# Altium PCB esp32control.PcbDoc
Units mil, origin at the board's own origin, x right, y up, seen from the top; angles counter-clockwise.
Board outline 1740 x 3934 mil, 2 copper layers (Top Layer, Bottom Layer); 18 components, 19 nets, 193 pads, 23 vias.
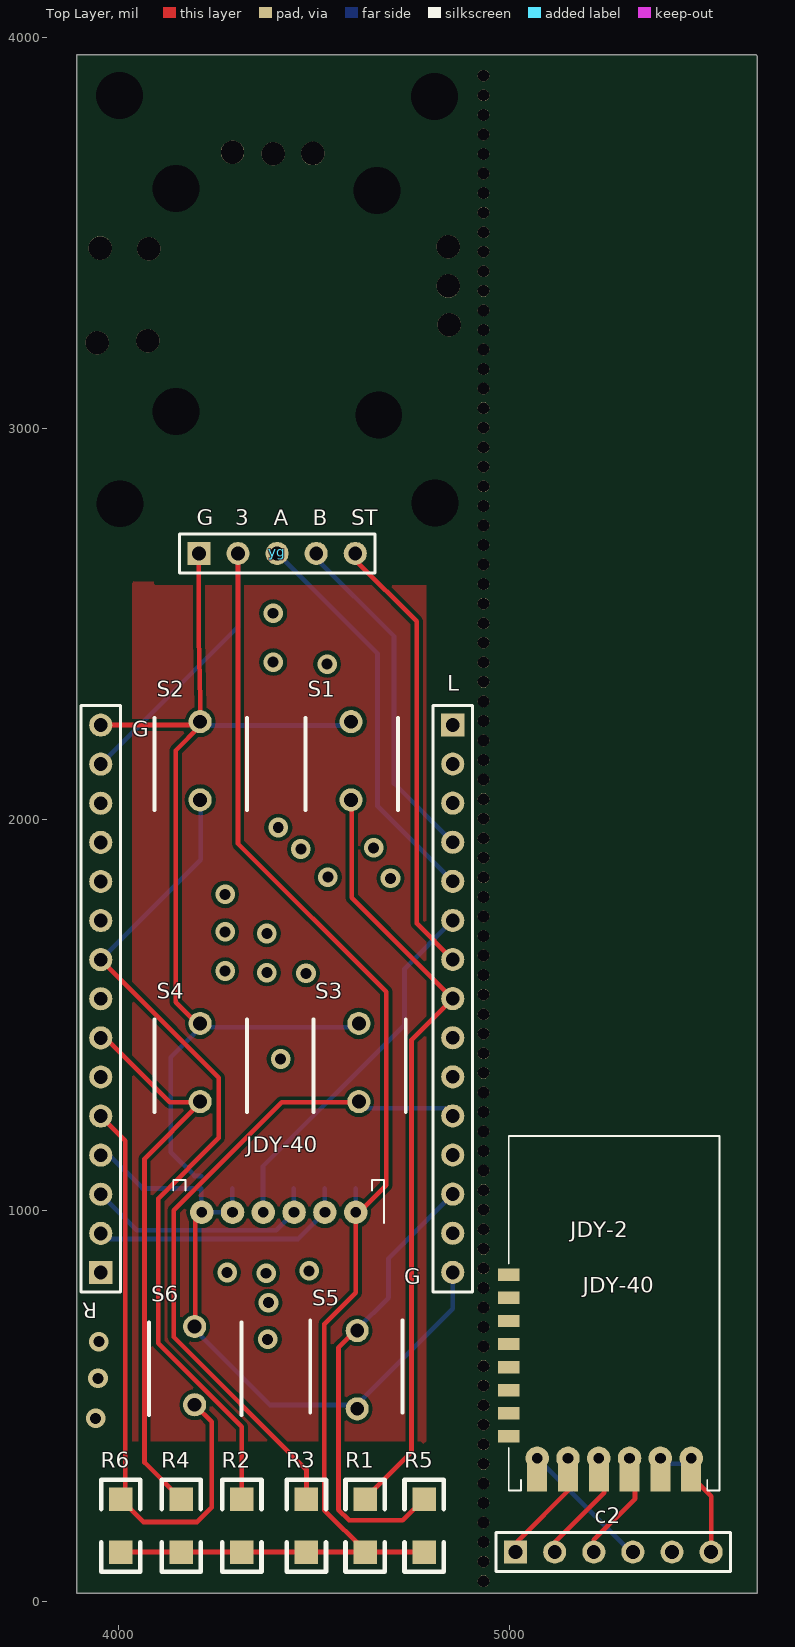
[diagram p0: Top Layer view]
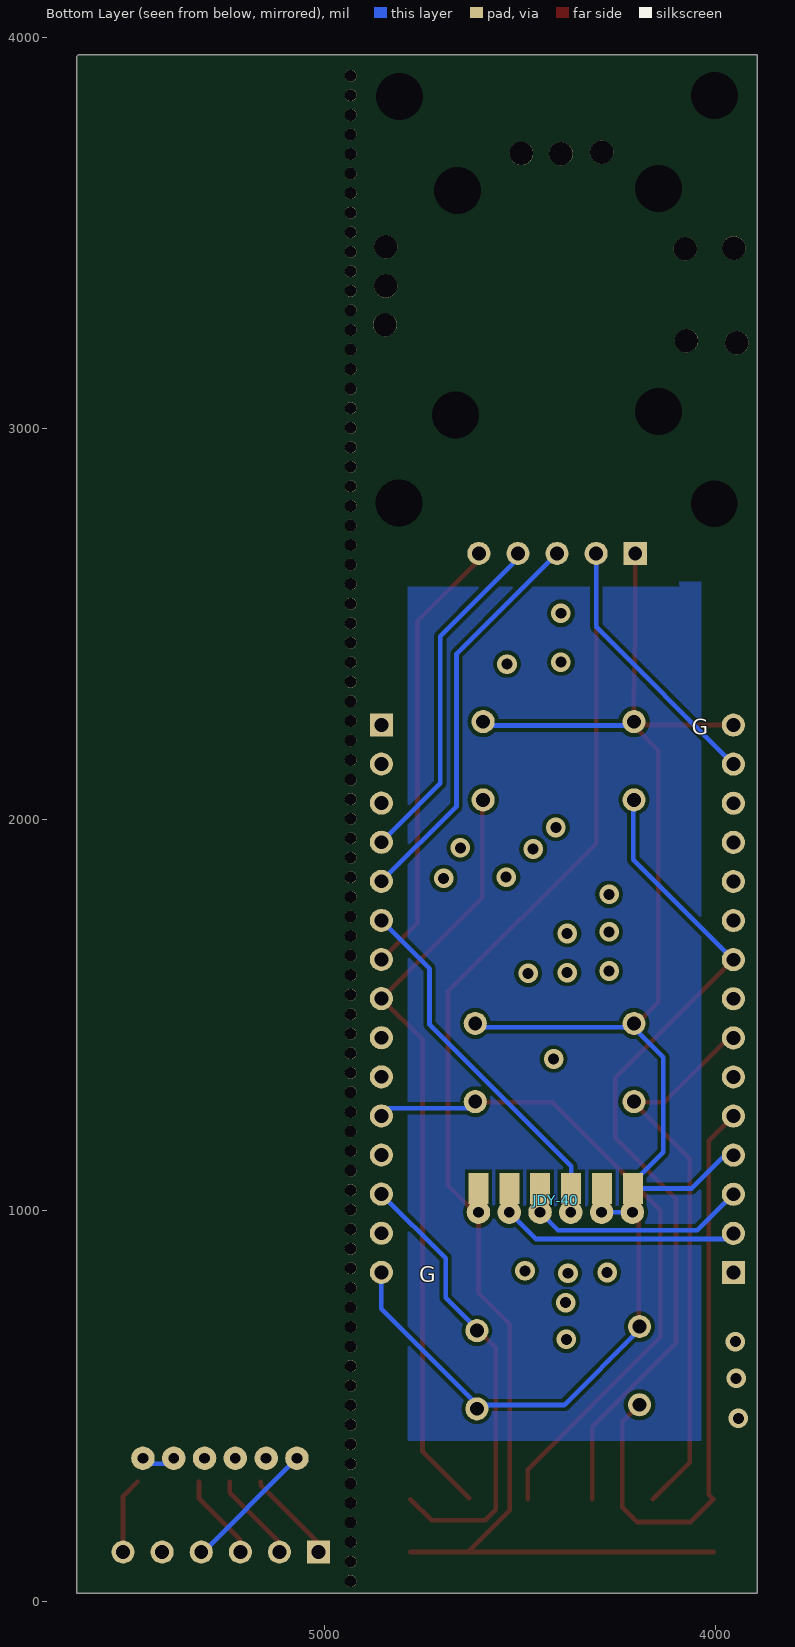
[diagram p1: Bottom Layer view, seen from below]

## Layer stack, top to bottom
Top Solder: solder mask 0.4, Solder Resist, Dk 3.5
Top Layer: signal copper 1.4
Dielectric 1: dielectric 12.6, FR-4, Dk 4.8
Bottom Layer: signal copper 1.4
Bottom Solder: solder mask 0.4, Solder Resist, Dk 3.5

## Board outline
3894,21 5634,21 5634,3952 5631,3955 3894,3955

## Design rules (kind name [scope] priority, off if disabled: settings)
Clearance [All] p1: gap=10 ignorepadtopadclearanceinfootprint=FALSE except(0: Arc-Hole Track-Hole SMDPad-Hole THPad-Hole Via-Hole Fill-Hole Poly-Hole Region-Hole Text-Hole)
HoleSize [All] p1: absolutevalues=TRUE maxlimit=10000 minlimit=1 maxpercent=80.000 minpercent=20.000
PolygonConnect [All] p1: connectstyle=Relief reliefconductorwidth=10 reliefentries=4 polygonreliefangle="90 Angle" airgapwidth=10
RoutingVias [All] p1: holewidth=28 width=50 viastyle="Through Hole" minholewidth=28 minwidth=50 maxholewidth=10000 maxwidth=99999
SolderMaskExpansion [All] p1: expansion=4
Width [All] p1: maxlimit=32 minlimit=8 preferedwidth=12
29 further rules are at their usual default settings.

## Components (designator, comment, footprint, x,y, rotation, side; value= is the part's Value field where it differs from the comment)
c2 "Header 6" HDR1X6 5016,126 r0 top
JDY-2 "Header 6" JDY-401#1 4998.46,835.21 r0 top
JDY-40 "Header 6" JDY-401#2 4679.83,525.58 r180 top
L "Header 15" HDR1X15 4855.28,2241.41 r270 top
R "Header 15" HDR1X15 3955,841 r90 top
R1 "Res1" 1206 4631,261 r270 top value=1K
R2 "Res1" 1206 4316,261 r270 top value=1K
R3 "Res1" 1206 4481,261 r270 top value=1K
R4 "Res1" 1206 4161,261 r270 top value=1K
R5 "Res1" 1206 4782,261 r270 top value=1K
R6 "Res1" 1206 4006,261 r270 top value=1K
S1 "SW-PB" PCBCOMPONENT_1 5195.11,2359.68 r180 top
S2 "SW-PB" PCBCOMPONENT_1 4809.11,2359.69 r180 top
S3 "SW-PB" PCBCOMPONENT_1 5215.11,1587.89 r180 top
S4 "SW-PB" PCBCOMPONENT_1 4809.11,1587.89 r180 top
S5 "SW-PB" PCBCOMPONENT_1 4010.89,382.31 r0 top
S6 "SW-PB" PCBCOMPONENT_1 4795.11,812.68 r180 top
yg "Header 5" HDR1X5 4206,2680 r0 top

## Footprints (in the part's own frame and the unit in brackets; to place one, negate y for a bottom-side part, rotate by r counter-clockwise, add the part's x,y. Pads: shape width x height; smd on the part's side, far side on the other; paste and mask are expansions set on the pad)
1206 [mil]
  rect 60x60 smd: 1(0,0) 2(135,0)
  silkscreen extent -50,-50 185,50
HDR1X5 [mm] "Connector; Header; 5 Position"
  rect 1.5x1.5 hole 0.9: 1(0,0)
  round 1.5 hole 0.9: 2(2.54,0) 3(5.08,0) 4(7.62,0) 5(10.16,0)
  silkscreen extent -1.27,-1.27 11.43,1.27
HDR1X6 [mm] "Connector; Header; 6 Position"
  rect 1.5x1.5 hole 0.9: 1(0,0)
  round 1.5 hole 0.9: 2(2.54,0) 3(5.08,0) 4(7.62,0) 5(10.16,0) 6(12.7,0)
  silkscreen extent -1.27,-1.27 13.97,1.27
HDR1X15 [mm] "Connector; Header; 15 Position"
  rect 1.5x1.5 hole 0.9: 1(0,0)
  round 1.5 hole 0.9: 2(2.54,0) 3(5.08,0) 4(7.62,0) 5(10.16,0) 6(12.7,0) 7(15.24,0) 8(17.78,0) 9(20.32,0) 10(22.86,0) 11(25.4,0) 12(27.94,0) 13(30.48,0) 14(33.02,0) 15(35.56,0)
  silkscreen extent -1.27,-1.27 36.83,1.27
JDY-401#1 [mm]
  rect 1.3x2 smd: 1(11.85,-13.092) 2(9.85,-13.092) 3(7.85,-13.092) 4(5.85,-13.092) 5(3.85,-13.092) 6(1.85,-13.092)
  round 1.524 hole 0.7: 1(11.85,-11.918) 2(9.85,-11.918) 3(7.85,-11.918) 4(5.85,-11.918) 5(3.85,-11.918) 6(1.85,-11.918)
  rect 1.4x0.8 smd: ""(0,-10.5) ""(0,-9) ""(0,-7.5) ""(0,-6) ""(0,-4.5) ""(0,-3) ""(0,-1.5) ""(0,0)
  silkscreen extent 0,-14.02 13.7,9.01
JDY-401#2 [mm]
  round 1.524 hole 0.7: 1(11.85,-11.918) 2(9.85,-11.918) 3(7.85,-11.918) 4(5.85,-11.918) 5(3.85,-11.918) 6(1.85,-11.918)
  rect 1.3x2 smd far side: 1(11.883,-13.473) 2(9.876,-13.473) 3(7.87,-13.473) 4(5.863,-13.473) 5(3.857,-13.473) 6(1.85,-13.473)
  Top Layer lines w0.5: 1.85,-11.694 1.85,-11.918
  silkscreen extent 0,-14.02 13.7,-11.23
PCBCOMPONENT_1 [mm]
  round 1.5 hole 0.9: 1(15.24,7.874) 2(15.24,2.794)
  silkscreen extent 12.19,2.54 18.19,8.54

## Part data
c2 JDY-2 JDY-40: "Header, 6-Pin", LatestRevisionDate=17-Jul-2002, LatestRevisionNote="Re-released for DXP Platform.", Publisher="Altium Limited"
L R: "Header, 15-Pin", LatestRevisionDate=17-Jul-2002, LatestRevisionNote="Re-released for DXP Platform.", Publisher="Altium Limited"
R1 R2 R3 R4 R5 R6: "Resistor", LatestRevisionDate=17-Jul-2002, LatestRevisionNote="Re-released for DXP Platform.", PackageDescription="Axial Device, Thru-Hole; 2 Leads; 0.3 in Pin Spacing", PackageReference=AXIAL-0.3, Published=8-Jun-2000, Publisher="Altium Limited"
S1 S2 S3 S4 S5 S6: "Switch", LatestRevisionDate=17-Jul-2002, LatestRevisionNote="Re-released for DXP Platform.", PackageDescription="Switch; 2 Leads", PackageReference=SPST-2, Published=24-Mar-1999, Publisher="Altium Limited"
yg: "Header, 5-Pin", LatestRevisionDate=17-Jul-2002, LatestRevisionNote="Re-released for DXP Platform.", Publisher="Altium Limited"

## Free pads (board coordinates)
  round 60 hole 60: 6(3946,3219) 6(3954,3461) 6(4075,3224) 6(4078,3459) 6(4292,3706) 6(4396,3702) 6(4497,3703) 6(4844,3364) 6(4844,3464) 6(4846,3265)
  round 60 hole 120: 6(4003,3851) 6(4004,2807) 6(4147,3043) 6(4147,3613) 6(4661,3608) 6(4666,3034) 6(4809,3849) 6(4810,2809)
  round 30 hole 30: 6(4934,51.53) 107(4934,101.53) 108(4934,151.53) 109(4934,201.53) 110(4934,251.53) 111(4934,301.53) 112(4934,351.53) 113(4934,401.53) 114(4934,451.53) 115(4934,501.53) 116(4934,551.53) 117(4934,601.53) 118(4934,651.53) 119(4934,701.53) 120(4934,751.53) 121(4934,801.53) 122(4934,851.53) 123(4934,901.53) 124(4934,951.53) 125(4934,1001.53) 126(4934,1051.53) 127(4934,1101.53) 128(4934,1151.53) 129(4934,1201.53) 130(4934,1251.53) 131(4934,1301.53) 132(4934,1351.53) 133(4934,1401.53) 134(4934,1451.53) 135(4934,1501.53) 136(4934,1551.53) 137(4934,1601.53) 138(4934,1651.53) 139(4934,1701.53) 140(4934,1751.53) 141(4934,1801.53) 142(4934,1851.53) 143(4934,1901.53) 144(4934,1951.53) 145(4934,2001.53) 146(4934,2051.53) 147(4934,2101.53) 148(4934,2151.53) 149(4934,2201.53) 150(4934,2251.53) 151(4934,2301.53) 152(4934,2351.53) 153(4934,2401.53) 154(4934,2451.53) 155(4934,2501.53) 156(4934,2551.53) 157(4934,2601.53) 158(4934,2651.53) 159(4934,2701.53) 160(4934,2751.53) 161(4934,2801.53) 162(4934,2851.53) 163(4934,2901.53) 164(4934,2951.53) 165(4934,3001.53) 166(4934,3051.53) 167(4934,3101.53) 168(4934,3151.53) 169(4934,3201.53) 170(4934,3251.53) 171(4934,3301.53) 172(4934,3351.53) 173(4934,3401.53) 174(4934,3451.53) 175(4934,3501.53) 176(4934,3551.53) 177(4934,3601.53) 178(4934,3651.53) 179(4934,3701.53) 180(4934,3751.53) 181(4934,3801.53) 182(4934,3851.53) 183(4934,3901.53)

## Via types
v1: diameter 50, hole 28, Top Layer to Bottom Layer, 23 vias

## Nets (pads, with @x,y where several pads share a name; then routed paths per layer and width w, separated by ;. In a path a pad name is that pad's centre, name@x,y a point inside that pad or via, vN(x,y) a via of type N, cw(c..) or ccw(c..) an arc to the next point about the centre after c; other vN are vias at no path point)
3v: JDY-40.6 R1.2 R2.2 R3.2 R4.2 R5.2 R6.2 R.14 yg.2 | length 4337.1
  Top Layer w12: R6.2 R4.2 R2.2 R3.2 R1.2 R5.2@4781,126 ; yg.2 4306,1938 4685,1559 4685,1063.96 4607,985.96 4607,789 4527,709 4527,233 R1.2@4631,129
  Bottom Layer w12: R.14 4306,2492 yg.2 ; JDY-40.6@4607,994.8 JDY-40.6@4607,1056
a: L.5 yg.3 | length 1024.7
  Bottom Layer w12: yg.3 4663,2423 4663,2033.68 L.5
b: L.4 yg.4 | length 871.7
  Bottom Layer w12: yg.4@4505,2668 4705,2468 4705,2091.68 L.4
GND: JDY-40.1 JDY-40.2 L.15 R.4 R.15 S1.2 S2.2 S3.2 S4.2 S5.2 S6.2 yg.1 | length 4503.1
  Top Layer w12: R.15 4210,2241 S2.2@4211,2240 ; S6.2@4197,693 4197,978.5 JDY-40.1@4213.3,994.8 ; yg.1 4206,2465 4210.78,2249.72 S2.2@4211,2240 ; S4.2@4211,1468.2 4147,1532.2 4147,2176 S2.2@4211,2240
  Bottom Layer w12: R.4 3977,1141 4062,1056 4212,1056 4212,1025.3 4213.3,1024 4213.3,994.8 4292.04,994.8 4292.04,1024 4291,1025.04 JDY-40.2@4291,1056 ; S6.2@4197,693 4388,502 4609,502 4855.28,748.28 L.15 ; S2.2@4211,2240 S1.2@4597,2240 ; JDY-40.1@4212,1088 4195,1088 4134,1149 4134,1391.2 4211,1468.2 S3.2@4617,1468.2
rg: c2.6 JDY-2.1 JDY-2.2 | length 273.9
  Top Layer w12: JDY-2.1@5479,305.8 5516,268.8 c2.6
  Bottom Layer w12: JDY-2.2@5400.26,352 JDY-2.1@5479,352
rs: c2.3 JDY-2.3 | length 223.5
  Top Layer w12: c2.3 5216,157 5321.52,262.52 JDY-2.3@5321.52,305.8
rvc: c2.4 JDY-2.6 | length 324.3
  Bottom Layer w12: JDY-2.6@5085.3,352 5311.3,126 c2.4
rx: JDY-40.4 R.3 | length 613.2
  Bottom Layer w12: R.3 4047.2,948.8 4403.52,948.8 4449.52,994.8 4449.52,1025 4449,1025.52 JDY-40.4@4449,1056
rx1: c2.2 JDY-2.4 | length 232.3
  Top Layer w12: c2.2 5116,151 5242.78,277.78 JDY-2.4@5242.78,305.8
s: JDY-40.3 L.6 | length 947.9
  Bottom Layer w12: JDY-40.3@4370.78,994.8 4370.78,1025 4370,1025.78 4370,1056 4370,1113 4732,1475 4732,1618.13 L.6
s1: L.8 R1.1 S1.1 | length 1983.7
  Top Layer w12: S1.1@4597,2047.8 4597,1799.68 L.8 4750,1436.13 4750,383 R1.1@4631,264
s2: R2.1 R.9 S2.1 | length 2170.8
  Top Layer w12: R.9 4257,1339 4257,1185 4102,1030 4102,660.18 4316,446.18 R2.1
  Bottom Layer w12: R.9 4211,1897 S2.1@4211,2047.8
s3: L.11 R3.1 S3.1 | length 1721.3
  Top Layer w12: R3.1 4481,337 4142,676 4142,1000 4418,1276 S3.1@4617,1276
  Bottom Layer w12: S3.1@4617,1276 4632,1261 4835.68,1261 L.11
s4: R4.1 R.7 S4.1 | length 1437.9
  Top Layer w12: R.7 3967,1441 4132,1276 4211,1276 4067,1132 4067,355 R4.1
s5: L.13 R5.1 S5.1 | length 1180
  Top Layer w12: S5.1@4609,694.2 4563,648.2 4563,234 4590,207 4727,207 R5.1@4781,261
  Bottom Layer w12: S5.1@4609,694.2 4691,776.2 4691,877.13 L.13
s6: R6.1 R.5 S6.1 | length 1561.6
  Top Layer w12: R.5 4018,1178 4018,273 R6.1 4064,203 4202,203 4239,240 4239,458.8 S6.1@4197,500.8
st: L.7 yg.5 | length 1141.8
  Top Layer w12: yg.5 4606,2663 4763,2506 4763,1733.68 L.7
tx: JDY-40.5 R.2 | length 668.6
  Bottom Layer w12: R.2 3969.2,926.8 4460.26,926.8 4528.26,994.8 4528.26,1025 4528,1025.26 JDY-40.5@4528,1056
tx1: c2.1 JDY-2.5 | length 241.1
  Top Layer w12: c2.1 5016,148.91 5164.04,296.95 JDY-2.5@5164.04,305.8
pads on no net: c2.5 JDY-2. L.1 L.2 L.3 L.9 L.10 L.12 L.14 R.1 R.6 R.8 R.10 R.11 R.12 R.13
copper on no net:
  other v1: 3942,468 3948,570 3950,664 4382,670 4384,764 4378,839 4278,841 4488,845 4415,1387 4480,1606 4380,1608 4273,1612 4380,1708 4273,1712 4273,1808 4696,1849 4536,1852 4467,1924 4653,1927 4409,1979 4534,2397 4396,2402 4396,2527

## Polygon pours and split planes (outlines as drawn)
no net on Top Layer "Top Layer-No Net" (solid, pour order 5): 4091,2602 4095,2598 4787,2598 4787,410 4780,403 4774,409 4035,409 4035,2604 4040,2609 4041,2608 4091,2608
GND on Top Layer "Mechanical 8-GND" (solid, pour order 1): 5586,368
no net on Bottom Layer "Bottom Layer-No Net" (solid, pour order 9): 4019,2519
no net on Bottom Layer "Bottom Layer-No Net 1" (solid, pour order 7): 4788,2595 4092,2595 4091,2596 4093,2598 4093,2608 4037,2608 4037,411 4791,411 4788,414

## Silkscreen, mask and mechanical layers (free items; w line width, h text height)
Top Overlay:
  text "G" at 4200,2752 h40
  text "3" at 4299,2752 h40
  text "A" at 4398,2752 h40
  text "B" at 4497,2752 h40
  text "ST" at 4596,2752 h40
  text "G" at 4035,2211 h40
  text "G" at 4731,811 h40
Bottom Overlay:
  text "G" at 4061,2216 h40
  text "G" at 4758,816 h40
Mechanical 1:
  circle w0.5: c4810.36,3850.76 r59.06
  circle w0.5: c4857,2239.41 r23.62
  circle w0.5: c4003.27,3850.76 r59.06
  circle w0.5: c4857,839.41 r40.17
  circle w0.5: c4606.82,2679.5 r23.62
  circle w0.5: c4810.36,2807.45 r59.06
  circle w0.5: c4003.27,2807.45 r58.99
Mechanical 8:
  lines w0.5: 4718.41,839.41 4758.57,839.41 4857,839.41 ; 4857,740.98 4857,839.41 ; 4857,978 4857,937.83 4857,839.41 ; 4862.72,688.15 4862.72,728.32 ; 4995.59,839.41 4955.42,839.41 4857,839.41 ; 3904.85,2807.45 3845.86,2807.45 3904.85,2807.45 ; 3904.85,2807.45 4003.27,2807.45 ; 3904.85,2807.45 4003.27,2807.45 ; 3904.85,3850.76 3845.79,3850.76 3904.85,3850.76 ; 3904.85,3850.76 4003.27,3850.76 ; 3904.85,3850.76 4003.27,3850.76 ; 4003.27,2709.03 4003.27,2650.04 4003.27,2709.03 ; 4003.27,2709.03 4003.27,2807.45 ; 4003.27,2709.03 4003.27,2807.45 ; 4003.27,2807.45 4101.7,2807.45 ; 4003.27,2807.45 4003.27,2905.88 ; 4003.27,2807.45 4101.7,2807.45 ; 4003.27,2807.45 4003.27,2905.88 ; 4003.27,2905.88 4003.27,2964.87 4003.27,2905.88 ; 4003.27,3752.33 4003.27,3693.28 4003.27,3752.33 ; 4003.27,3752.33 4003.27,3850.76 ; 4003.27,3752.33 4003.27,3850.76 ; 4003.27,3850.76 4101.7,3850.76 ; 4003.27,3850.76 4003.27,3949.18 ; 4003.27,3850.76 4101.7,3850.76 ; 4003.27,3850.76 4003.27,3949.18 ; 4003.27,3949.18 4003.27,4008.24 4003.27,3949.18 ; 4101.7,2807.45 4160.69,2807.45 4101.7,2807.45 ; 4101.7,3850.76 4160.75,3850.76 4101.7,3850.76 ; 4508.39,2679.5 4484.77,2679.5 4508.39,2679.5 ; 4508.39,2679.5 4606.82,2679.5 ; 4508.39,2679.5 4606.82,2679.5 ; 4606.82,2581.07 4606.82,2557.45 4606.82,2581.07 ; 4606.82,2581.07 4606.82,2679.5 ; 4606.82,2581.07 4606.82,2679.5 ; 4606.82,2679.5 4705.24,2679.5 ; 4606.82,2679.5 4705.24,2679.5 ; 4705.24,2679.5 4728.86,2679.5 4705.24,2679.5 ; 4711.94,2807.45 4652.88,2807.45 4711.94,2807.45 ; 4711.94,2807.45 4810.36,2807.45 ; 4711.94,2807.45 4810.36,2807.45 ; 4711.94,3850.76 4652.88,3850.76 4711.94,3850.76 ; 4711.94,3850.76 4810.36,3850.76 ; 4711.94,3850.76 4810.36,3850.76 ; 4758.57,2239.41 4734.95,2239.41 4758.57,2239.41 ; 4758.57,2239.41 4857,2239.41 ; 4758.57,2239.41 4857,2239.41 ; 4810.36,2709.03 4810.36,2649.97 4810.36,2709.03 ; 4810.36,2709.03 4810.36,2807.45 ; 4810.36,2709.03 4810.36,2807.45 ; 4810.36,2807.45 4908.79,2807.45 ; 4810.36,2807.45 4810.36,2905.88 ; 4810.36,2807.45 4908.79,2807.45 ; 4810.36,2807.45 4810.36,2905.88 ; 4810.36,2905.88 4810.36,2964.93 4810.36,2905.88 ; 4810.36,3752.33 4810.36,3693.28 4810.36,3752.33 ; 4810.36,3752.33 4810.36,3850.76 ; 4810.36,3752.33 4810.36,3850.76 ; 4810.36,3850.76 4908.79,3850.76 ; 4810.36,3850.76 4908.79,3850.76 ; 4810.36,3850.76 4810.36,3949.18 ; 4810.36,3850.76 4810.36,3949.18 ; 4810.36,3949.18 4810.36,4008.24 4810.36,3949.18 ; 4857,2140.98 4857,2117.36 4857,2140.98 ; 4857,2140.98 4857,2239.41 ; 4857,2140.98 4857,2239.41 ; 4857,2239.41 4955.42,2239.41 ; 4857,2239.41 4857,2337.83 ; 4857,2239.41 4955.42,2239.41 ; 4857,2239.41 4857,2337.83 ; 4857,2337.83 4857,2361.45 4857,2337.83 ; 4908.79,2807.45 4967.84,2807.45 4908.79,2807.45 ; 4908.79,3850.76 4967.84,3850.76 4908.79,3850.76 ; 4955.42,2239.41 4979.05,2239.41 4955.42,2239.41 ; 4070.91,1668.54 4105.82,1668.54 4070.91,1668.54
Drill Drawing:
  lines w10: 3896,28 3902,22 5635,22 5635,3956 3896,3956 3896,28

## Text inside footprints (layer, text, board x,y; h text height)
JDY-2: Top Overlay "JDY-40" at 5187.46,788.8 h40